# Altium PCB HiFive1.B01.PcbDoc (part 2 of 2)
Units mil, origin at the board's own origin, x right, y up, seen from the top; angles counter-clockwise.
Board outline 2700 x 2100 mil, 2 copper layers (Top Layer, Bottom Layer), stack 61 mil thick; 112 components, 78 nets, 451 pads, 247 vias.
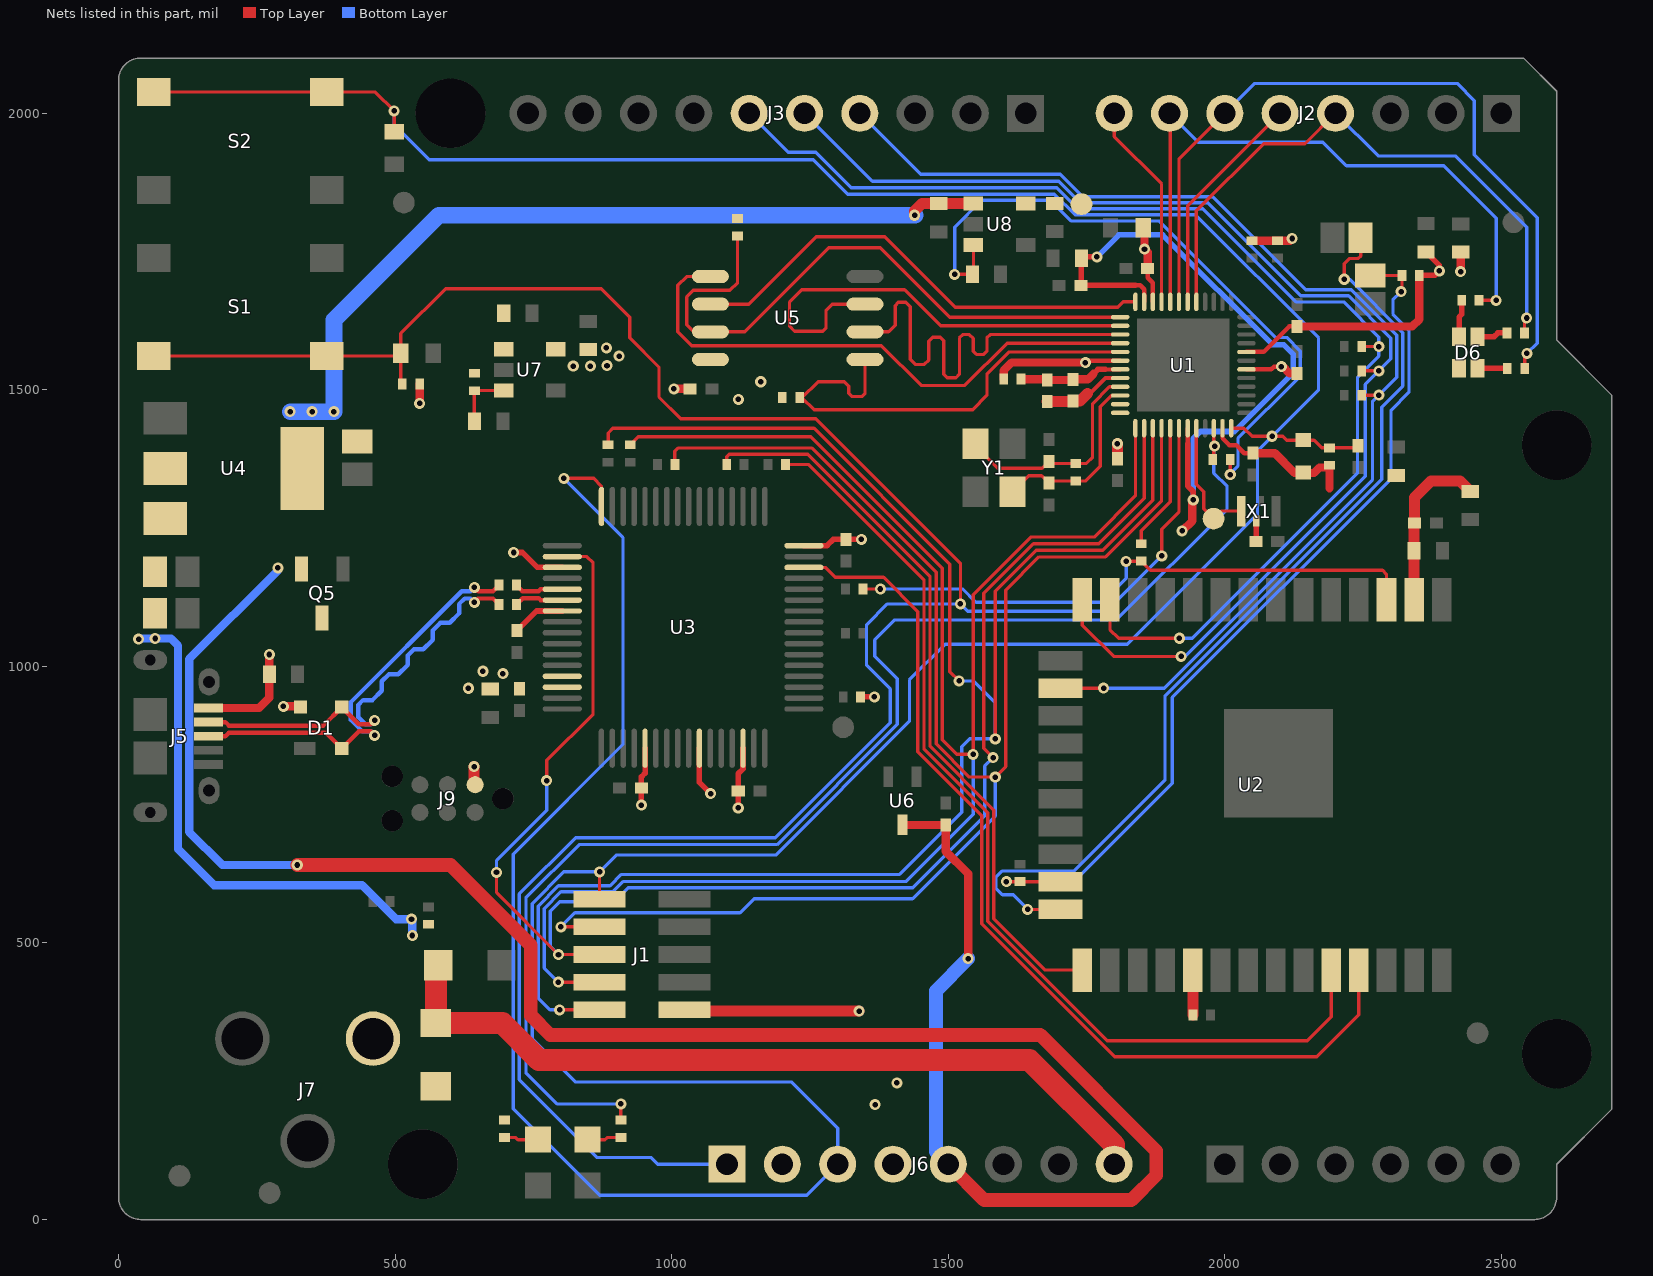
[diagram p2: the nets of this part, all layers, seen from the top]

## Via types
v1: diameter 20, hole 10, Top Layer to Bottom Layer, tented both sides, 229 vias
v2: diameter 20, hole 10.1, Top Layer to Bottom Layer, tented both sides, 18 vias

## Nets (pads, with @x,y where several pads share a name; then routed paths per layer and width w, separated by ;. In a path a pad name is that pad's centre, name@x,y a point inside that pad or via, vN(x,y) a via of type N, cw(c..) or ccw(c..) an arc to the next point about the centre after c; other vN are vias at no path point) (continued)
GPIO_19: J2.4 R18.2 U1.41 | length 1112.7
  Top Layer w6: U1.41@1948.62,1659.17 1948.62,1823.62 2070,1945 2145,1945 J2.4@2200,2000 ; R18.2@2541.75,1603 2541.75,1626.06 v1(2545.69,1630)
  Bottom Layer w6: J2.4@2200,2000 2277,1923 2417,1923 2545.69,1794.31 v1(2545.69,1630)
GPIO_20: J2.5 U1.42 | length 410.1
  Top Layer w6: U1.42@1932.87,1659.17 1932.87,1832.87 J2.5@2100,2000
GPIO_21: J2.6 R17.2 U1.43 | length 1401.7
  Top Layer w6: U1.43@1917.13,1659.17 1917.13,1917.13 J2.6@2000,2000 ; R17.2@2542.28,1539 2542.28,1562.06 v1(2546.22,1566)
  Bottom Layer w6: J2.6@2000,2000 2054,2054 2420,2054 2451,2023 2451,1925 2564.69,1811.31 2564.69,1584.46 v1(2546.22,1566)
GPIO_22: J2.7 R19.2 U1.44 | length 1186
  Top Layer w6: J2.7@1900,2000 1901.38,1998.62 U1.44@1901.38,1659.17 ; R19.2@2463.69,1662 v1(2490.69,1662)
  Bottom Layer w6: J2.7@1900,2000 1952,1948 2177,1948 2220,1905 2396,1905 2490.69,1810.31 v1(2490.69,1662)
GPIO_23: J2.8 U1.45 | length 376.3
  Top Layer w6: J2.8@1800,2000 1800,1958 1885.63,1872.37 U1.45@1885.63,1659.17
JTAG_TCK: J1.4 R25.2 U1.13 | length 2996.5
  Top Layer w6: v1(795.17,429.12) J1.4@869.57,429.12 ; R25.2@925,1400.75 939.27,1415.02 1251.73,1415.02 1489,1177.75 1489,867.2 1515.2,841 v1(1545,841) 1545,1130 1649,1234 1764,1234 1838.39,1308.39 U1.13@1838.39,1430.83
  Bottom Layer w6: v1(795.17,429.12) 769.61,454.68 769.61,562.21 799.8,592.4 893.11,592.4 911.81,611.1 1423.14,611.1 1545,732.96 v1(1545,841)
JTAG_TDI: J1.8 R24.2 U1.16 | length 2869.1
  Top Layer w6: v1(799.61,529.12) J1.8@869.57,529.12 ; R24.2@1005.75,1365 1005.75,1389.31 1011.28,1394.84 1253.8,1394.84 1478,1170.64 1478,859.92 1537.92,800 v1(1585,800) 1604,819 1604,1138.09 1663.91,1198 1784.46,1198 1885.63,1299.17 U1.16@1885.63,1430.83
  Bottom Layer w6: v1(799.61,529.12) 825.02,554.52 1123.48,554.52 1148.94,579.98 1435.5,579.98 1585,729.48 v1(1585,800)
JTAG_TDO: J1.6 U1.14 U3.2 | length 2806.2
  Top Layer w6: v1(683.22,627.52) 683.22,591.2 v1(795.3,479.12) J1.6@869.57,479.12 ; v1(773.81,793.39) 774.32,793.91 774.32,830.31 857.69,913.68 857.69,1187.4 846.42,1198.66 U3.2@802.13,1198.66 ; v1(1581,835) 1564,852 1564,1132.03 1653.97,1222 1772,1222 1854.13,1304.13 U1.14@1854.13,1430.83
  Bottom Layer w6: v1(683.22,627.52) 683.22,649.22 773.81,739.81 v1(773.81,793.39) ; v1(795.3,479.12) 780.61,493.81 780.61,557.65 797.71,574.75 895.63,574.75 920.98,600.1 1436.02,600.1 1566,730.08 1566,820 v1(1581,835)
JTAG_TMS: J1.2 R26.2 U1.15 | length 3162.7
  Top Layer w6: v1(797.34,379.12) J1.2@869.57,379.12 ; R26.2@885,1404.69 885,1422.05 893.4,1430.45 1257.32,1430.45 1502.87,1184.91 1502.87,990.46 v1(1519.53,973.81) ; v1(1585,869) 1585,1136.06 1658.94,1210 1779.49,1210 1869.88,1300.4 U1.15@1869.88,1430.83
  Bottom Layer w6: v1(797.34,379.12) 779.81,379.12 758.61,400.32 758.61,566.76 795.24,603.4 888.55,603.4 909.05,623.9 1411.9,623.9 1524.5,736.5 1524.5,854.5 1539,869 v1(1585,869) 1585,933.91 1545.11,973.81 v1(1519.53,973.81)
LF_CLK: TP5.1 U1.20 X1.3 | length 232.3
  Top Layer w6: U1.20@1948.62,1430.83 1948.62,1409 1948.38,1408.76 1948.38,1329.21 1962,1315.59 1962,1284.89 TP5.1@1979.74,1267.16 1993.57,1281 X1.3@2029.5,1281
NetC8_1: C8.1 C9.1 U1.8 | length 149.5
  Top Layer w7: 1752.08,1493.26 1756.43,1493.26 1784.55,1521.38 U1.8@1810.83,1521.38
  Top Layer w20: C8.1@1678.99,1478.69 1724.83,1478.69 C9.1@1725.83,1479.69 1738.51,1479.69 1752.08,1493.26
NetC12_1: C12.1 R4.1 U1.9 Y1.1 | length 402.2
  Top Layer w6: Y1.1@1549.54,1402.31 1549.54,1398.75 1589.7,1358.59 1669.57,1358.59 C12.1@1681.83,1370.84 1685.76,1366.91 R4.1@1730.45,1366.91 1749.33,1366.91 1760.83,1378.4 1760.83,1475.02 1791.43,1505.63 U1.9@1810.83,1505.63
NetC13_1: C13.1 R4.2 U1.10 Y1.3 | length 338
  Top Layer w6: Y1.3@1616.46,1315.69 1645.36,1344.59 1668.71,1344.59 1678.94,1334.36 1679.99,1335.41 R4.2@1730.45,1335.41 1748.67,1335.41 1775,1361.74 1775,1469.4 1795.48,1489.88 U1.10@1810.83,1489.88
NetC21_1: C21.1 R31.1 U7.3 | length 108.7
  Top Layer w6: C21.1@643.41,1443 643.18,1443.22 R31.1@643.18,1498.66 643.29,1498.77 U7.3@696.11,1498.77
NetC22_1: C22.1 R32.2 U8.3 | length 1232.6
  Top Layer w6: v1(1511.46,1708.88) C22.1@1543.58,1708.88 1545.48,1710.78 U8.3@1545.48,1761.99 ; R32.2@2009.75,1374 2009.85,1373.9 v1(2009.85,1346.79)
  Bottom Layer w6: v1(1511.46,1708.88) 1511.46,1794.35 1560.11,1843 1684.17,1843 1721.79,1805.38 1880.73,1805.38 2091.36,1594.75 2111.79,1594.75 2136.47,1570.07 2136.47,1525.38 2129.77,1518.68 ; v1(2009.85,1346.79) 2009.85,1348.35 2023.75,1362.25 2023.75,1412.18 2130.01,1518.44
NetD6_1: D6.1 R19.1 | length 67.9
  Top Layer w10: D6.1@2423.54,1596.09 2423.54,1631.68 2428.25,1636.39 R19.1@2428.25,1662
NetD6_2: D6.2 R18.1 | length 56.1
  Top Layer w10: D6.2@2457,1596.09 2486.84,1596.09 2493.75,1603 R18.1@2510.25,1603
NetD6_3: D6.3 R17.1 | length 49.9
  Top Layer w10: D6.3@2457,1539 R17.1@2506.85,1539
NetD9_2: D9.2 R27.2 | length 61.6
  Top Layer w6: R27.2@698,148.28 718.03,148.28 721.97,144.34 D9.2@758,144.34
NetD10_2: D10.2 R28.2 | length 61.6
  Top Layer w6: D10.2@848,144.34 879.22,144.34 883.16,148.28 R28.2@908,148.28
NetD13_2: D13.2 J7.1
NetR12_2: R12.2 U2.29 | length 81
  Top Layer w20: R12.2@1942.28,370 U2.29@1942.28,450.98
PLL_AVDD: C8.2 C9.2 R1.2 U1.7 | length 183.8
  Top Layer w7: 1784.13,1537.13 U1.7@1810.83,1537.13
  Top Layer w10: 1762.44,1529.11 1770.45,1537.13 1784.13,1537.13
  Top Layer w15: R1.2@1635.51,1519.37 1677.67,1519.37 C8.2@1678.99,1518.06 1724.83,1518.06 C9.2@1725.83,1519.06 1752.38,1519.06 1762.44,1529.11
QSPI_CS0: R13.1 U1.5 U5.1 | length 858.8
  Top Layer w6: U5.1@1349.53,1555 1349.53,1493.53 1344,1488 1326,1488 1320,1494 1320,1507 1312,1515 1264.51,1515 1235.45,1485.93 1257.35,1464.03 1544.03,1464.03 1570,1490 1570,1528.2 1610.42,1568.62 U1.5@1810.83,1568.62
QSPI_DQ0: U1.4 U5.5 | length 1021.3
  Top Layer w6: U5.5@1070,1705 1027,1705 1011,1689 1011,1605 1036,1580 1379,1580 1451,1508 1530,1508 1606.37,1584.37 U1.4@1810.83,1584.37
QSPI_DQ1: U1.3 U5.2 | length 841.2
  Top Layer w6: U5.2@1349.53,1605 1392,1605 1404,1617 1404,1652.48 1409.72,1658.19 1423.41,1658.19 1431,1650.61 1431,1555 1440,1546 1457,1546 1465,1554 1465,1588.12 1472,1595.12 1485.88,1595.12 1492,1589 1492,1528 1498,1522 1514,1522 1520.26,1528.26 1520.26,1593.9 1526.48,1600.12 1537.88,1600.12 1545,1593 1545,1570 1551,1564 1564,1564 1570,1570 1570,1594 1576.12,1600.12 U1.3@1810.83,1600.12
QSPI_DQ2: U1.2 U5.3 | length 857.2
  Top Layer w6: U5.3@1349.53,1655 1290,1655 1279,1644 1279,1612 1273,1606 1222,1606 1213,1615 1213,1659 1235,1681 1421,1681 1486.13,1615.87 U1.2@1810.83,1615.87
QSPI_DQ3: R29.2 U1.1 U5.7 | length 1141.1
  Top Layer w6: R29.2@1119,1778.25 1119,1694 1105,1680 1039,1680 1027,1668 1027,1618 1040,1605 U5.7@1070,1605 1132,1605 1284,1757 1377,1757 1502.39,1631.61 U1.1@1810.83,1631.61
QSPI_SCK: U1.48 U5.6 | length 876
  Top Layer w6: U5.6@1070,1655 1139,1655 1261,1777 1385,1777 1512.76,1649.24 1806.24,1649.24 1816.17,1659.17 U1.48@1838.39,1659.17
RESET: C16.1 D3.2 D5.1 J1.10 J6.3 R5.1 S2.3 S2.4 U1.24 U3.64 | length 7629.2
  Top Layer w6: S2.4@63.5,2038.58 S2.3@376.5,2038.58 464.05,2038.58 v1(498.06,2004.57) D5.1@498.06,1966.92 ; v1(805,1340) 859,1340 872.99,1326.01 U3.64@872.99,1289.21 ; J1.10@869.57,579.12 v1(869.57,628.57) ; U1.24@2011.61,1430.83 2034.54,1430.83 2049.21,1416.16 v1(2085.71,1416.16) 2104.86,1416.16 2112.12,1408.9 2161.3,1408.9 2175.08,1395.12 R5.1@2189.32,1395.12 2236.89,1395.12 C16.1@2240.83,1399.06
  Bottom Layer w6: v1(498.06,2004.57) 498.06,1979.43 561.31,1916.18 1255.82,1916.18 1318,1854 1691.85,1854 1729.47,1816.38 1946.94,1816.38 2169.47,1593.85 2169.47,1499.92 v1(2085.71,1416.16) 2059,1389.45 2059,1275 1824,1040 1494.29,1040 1429.91,975.62 1429.91,900.78 1188.13,659 900,659 v1(869.57,628.57) 804.86,628.57 747.61,571.32 747.61,326.76 825.61,248.76 1216.05,248.76 1300,164.82 J6.3@1300,100 1244,44 869.48,44 713.4,200.08 713.4,660.4 911.85,858.85 911.85,1233.15 v1(805,1340)
SPI_CS2: R10.1 R21.2 SJ1.2 U2.23 | length 1639.3
  Top Layer w6: v1(1605,611) 1605.37,610.63 U2.23@1702.91,610.63 ; SJ1.2@2262.83,1706.96 R10.1@2316.32,1706.96 ; v1(2318.61,1677.5) 2320.25,1679.14 R10.1@2320.25,1706.96
  Bottom Layer w6: v1(1605,611) 1727,611 1905,789 1905,943.88 2300.51,1339.39 2300.51,1463.51 2333,1496 2333,1608.13 2304,1637.13 2304,1662.89 v1(2318.61,1677.5)
SPI_MISO: J3.5 R15.1 U2.14 | length 2240
  Top Layer w6: U2.14@1742.28,1120.28 1742.28,1074.72 1799,1018 v1(1921,1018) ; R15.1@2251.51,1534.37 v1(2278.51,1534.37)
  Bottom Layer w6: J3.5@1240,2000 1362.96,1877.04 1699.92,1877.04 1738.59,1838.38 1969.06,1838.38 2137.44,1670 2223.77,1670 2300,1593.77 2300,1555.86 v1(2278.51,1534.37) 2254,1509.86 2254,1343.79 1928.21,1018 v1(1921,1018)
SPI_MOSI: J3.4 R9.1 U2.16 | length 2164.3
  Top Layer w6: U2.16@1702.91,960.63 v1(1781,960.63) ; R9.1@2251.51,1490.37 v1(2278.51,1490.37)
  Bottom Layer w6: J3.4@1340,2000 1450.02,1889.98 1702.55,1889.98 1743.14,1849.38 1977.86,1849.38 2146.24,1681 2229.02,1681 2311,1599.02 2311,1522.86 v1(2278.51,1490.37) 2267,1478.86 2267,1336.99 1890.64,960.63 v1(1781,960.63)
SPI_SCK: J3.6 R16.1 U2.13 | length 2226.1
  Top Layer w6: U2.13@1792.28,1120.28 1792.28,1066.72 1808,1051 v1(1918,1051) ; R16.1@2251.51,1578.37 v1(2278.51,1578.37)
  Bottom Layer w6: J3.6@1140,2000 1210.5,1929.5 1260.5,1929.5 1324.6,1865.4 1696.01,1865.4 1734.03,1827.38 1960.26,1827.38 2100.41,1687.23 2128.64,1659 2214.97,1659 2278.51,1595.46 v1(2278.51,1578.37) 2278.51,1561.24 2240,1522.73 2240,1350 1941,1051 v1(1918,1051)
USB_D_N: D1.3 J5.2 R2.1 | length 777.6
  Top Layer w8: J5.2@162.5,899.41 193.07,899.41 199.37,893.11 370.24,893.11 D1.3@403.46,926.33 434.36,895.43 455.96,895.43 v1(462.96,902.43) ; v1(643.21,1115.89) 643.21,1116.39 649.71,1122.89 676.88,1122.89 R2.1@687.88,1111.89
  Bottom Layer w8: v1(462.96,902.43) 455.96,895.43 446.1,895.43 433.05,908.48 433.05,930.25 442,939.2 458.99,939.2 475.76,955.97 475.76,972.96 488.8,986 505.79,986 522.56,1002.77 522.56,1019.76 534,1031.2 550.99,1031.2 567.76,1047.97 567.76,1064.96 581.8,1079 598.79,1079 615.56,1095.77 615.56,1112.76 625.69,1122.89 636.21,1122.89 v1(643.21,1115.89)
USB_D_P: D1.2 J5.3 R6.1 | length 778.6
  Top Layer w8: J5.3@162.5,873.82 193.07,873.82 199.37,880.11 374.87,880.11 D1.2@403.46,851.53 434.36,882.43 455.96,882.43 v1(462.96,875.43) ; v1(643.21,1142.89) 650.21,1135.89 676.88,1135.89 R6.1@687.88,1146.89
  Bottom Layer w8: v1(462.96,875.43) 455.96,882.43 440.72,882.43 420.05,903.1 420.05,935.64 620.3,1135.89 636.21,1135.89 v1(643.21,1142.89)
USB_D_R_N: R2.2 U3.6 | length 88.8
  Top Layer w8: R2.2@719.38,1111.89 730.75,1123.26 759.35,1123.26 762.69,1119.92 U3.6@802.13,1119.92
USB_D_R_P: R6.2 U3.5 | length 88.5
  Top Layer w8: R6.2@719.38,1146.89 730,1136.26 759.35,1136.26 762.69,1139.61 U3.5@802.13,1139.61
VBUS: C29.2 D1.4 J5.1 Q5.3 | length 227.2
  Top Layer w15: J5.1@162.5,925 254,925 272.41,943.41 C29.2@272.41,986 v1(272.41,1021.59) ; v1(297.83,927.83) 327.15,927.83 D1.4@328.65,926.33
VDD_1V8: C1.1 C2.2 C3.2 C50.1 R1.1 TP1.1 U1.6 U1.30 U1.46 U8.5 | length 473.4
  Top Layer w8: v1(1747.83,1549.37) 1751.33,1552.87 U1.6@1810.83,1552.87 ; C2.2@1860.51,1719.37 1860.51,1702.87 1869.88,1693.5 U1.46@1869.88,1659.17 ; U1.30@2039.17,1537.13 2084.13,1537.13 2089,1542 v1(2102.47,1542)
  Top Layer w15: R1.1@1600.08,1519.37 1600.08,1534.73 1614.72,1549.37 v1(1747.83,1549.37) ; C1.1@1852.53,1793 1854.83,1790.7 v1(1854.83,1754.37) 1860.51,1748.69 C2.2@1860.51,1719.37 ; v1(2102.47,1542) 2105,1542 2117.32,1529.68 C3.2@2130.83,1529.68
VDD_3V3: C4.2 C5.2 C6.1 C7.1 C10.1 C11.1 C14.1 C15.1 C17.2 C18.2 C19.2 C20.2 C23.2 C24.1 C25.1 C26.1 C27.1 C28.2 C30.1 C47.1 D3.1 D6.4 J1.1 J6.2 J6.4 J9.1 R3.1 R5.2 R7.2 R8.2 R10.2 R13.2 R27.1 R29.1 R33.1 U1.11 U1.12 U1.19 U1.23 U1.32 U1.47 U2.2 U3.3 U3.7 U3.13 U3.14 U3.21 U3.26 U3.30 U3.48 U5.8 U7.5 X1.4 | length 3563.5
  Top Layer w8: 1838,1689 1846.91,1689 1854.13,1681.78 U1.47@1854.13,1659.17 ; 1932.87,1402.62 U1.19@1932.87,1430.83 ; U1.23@1995.87,1430.83 1995.87,1412.71 2008.29,1400.29 2020.71,1400.29 2035.32,1385.68 C5.2@2051,1385.69 ; U1.32@2039.17,1568.62 2070.59,1568.62 2116.66,1614.69 C18.2@2130.83,1614.68
  Top Layer w10: v1(714,1206) 730,1206 757.02,1178.98 U3.3@802.13,1178.98 ; C30.1@720,1064.68 755.55,1100.24 U3.7@802.13,1100.24 ; v1(945,749.22) C27.1@945,780 945,800.22 951.73,806.95 U3.21@951.73,852.2 ; U3.26@1050.16,852.2 1050.16,790.3 v1(1070.24,770.22) ; v1(1120.32,744.08) C26.1@1120.32,775 1120.32,806.08 1128.9,814.66 U3.30@1128.9,852.2 ; U3.48@1239.13,1218.35 1280.73,1218.35 1292.07,1229.68 C24.1@1315,1229.68 v1(1342.95,1229.68) ; R33.1@1341.5,945 v1(1366.31,945) ; v1@1769.22,1740.55 v1(1768.81,1740.55) 1743.14,1740.55 C10.1@1740.59,1738 1740.59,1689.91 C20.2@1739.69,1689 1838,1689 ; 1932.87,1402.62 1932.87,1326.33 1943,1316.2 v1(1943,1301) ; C17.2@2056.31,1226 2057.06,1226.75 X1.4@2057.06,1263.28 ; R10.2@2355.69,1706.96 2379.96,1706.96 v1(2388,1715) 2388,1725.2 C14.1@2363.8,1749.41
  Top Layer w15: v1(544.28,1475.72) R3.1@544.28,1511 ; v1(1003.76,1501.75) 1003.95,1501.93 C23.2@1033.08,1501.93 ; v1(1923,1245) 1941.31,1263.31 1941.31,1299.31 v1(1943,1301) ; R8.2@2049.01,1769.8 R7.2@2095.51,1769.8 2117.8,1769.8 v1(2121.74,1773.74) ; C5.2@2051,1385.69 2090.32,1385.68 2126.16,1349.84 D3.1@2138.56,1349.84 ; C18.2@2130.83,1614.68 2338.78,1614.69 2351.75,1627.65 R10.2@2351.75,1706.96 ; D3.1@2140.83,1347.58 D3.1@2138.56,1349.84 ; 2189.32,1322 2189.32,1359.68 2171.14,1359.68 2161.3,1349.84 D3.1@2138.56,1349.84 ; v1(2426.52,1713.87) C15.1@2426.52,1749.07
  Top Layer w20: v1(642.78,818.89) 642.78,787.99 J9.1@644.65,786.11 ; J1.1@1023.11,379.12 1025.4,376.83 v1(1338.74,376.83) ; C19.2@1805.83,1375.54 v1(1805.83,1402.62) ; U2.2@2342.28,1120.28 C6.1@2342.28,1209.1 2342.28,1258.2 C4.2@2343.18,1259.1 2343.18,1305.18 2373,1335 2425.59,1335 C7.1@2444,1316.59
  Bottom Layer w10: v1(1768.81,1740.55) 1808.47,1780.22 1887.51,1780.22 2085.97,1581.75 2106.4,1581.75 2123.47,1564.69 2123.47,1530.77 2017.48,1424.78 1956.08,1424.78 1943,1411.7 v1(1943,1301)
  other v1: 1367.8,207.86 1407.01,247.17 632.29,960.59 694.87,987.17 658.54,991.27 1120.69,1482.91 1160.97,1514.77 822,1543 853,1543 883,1544 905,1561 882,1576
VDD_5V0: C31.1 C42.1 C45.1 C48.1 J6.5 Q5.2 R31.2 U4.2 U4.4 U6.3 U7.1 U8.1 | length 5306.9
  Top Layer w15: U6.3@1417.21,714.02 1417.81,713.41 C31.1@1495.46,713.41 1495.46,665.75 1535.97,625.23 v1(1535.97,471.74)
  Top Layer w20: v1(1439.3,1815.71) 1439.3,1823.58 1452.44,1836.72 C48.1@1482.63,1836.72 1482.71,1836.8 U8.1@1545.48,1836.8
  Top Layer w25: v1(323,641) 600,641 745.27,495.73 745.27,368.66 780.31,333.61 1666.39,333.61 1876,124 1876,80 1831,35 1565,35 J6.5@1500,100
  Bottom Layer w15: v1(288,1178) 288,1173.5 127.5,1013 127.5,701 187.5,641 v1(323,641)
  Bottom Layer w25: J6.5@1500,100 1477.61,122.39 1477.61,413.38 v1(1535.97,471.74)
  Bottom Layer w30: v1(310,1460.64) v1(349.66,1460.64) v1(389.32,1460.64) 389.32,1626.32 579,1816 v1@1440,1816
VDD_CORE_EN: R28.1 R32.1 U1.22 | length 2420.8
  Top Layer w6: R28.1@908,183.71 v1(908,209) ; R32.1@1980,1378.75 1980,1398.88 1980.12,1399 U1.22@1980.12,1430.83
  Bottom Layer w6: v1(908,209) 792.48,209 736.53,264.95 736.53,582.07 832.45,678 1190.43,678 1407.65,895.22 1407.65,978.07 1367.22,1018.49 1367.22,1047.85 1403.37,1084 1803.5,1084 2004,1284.5 2004,1325.77 1980.12,1349.65 1980.12,1399 1980.62,1398.5 v1(1981.5,1398.5) 1981.5,1398.81 v1@1981.69,1399
VDD_DCIN: C43.1 C44.1 D12.1 D13.1 J6.8 R30.2 U4.3 | length 2414.1
  Top Layer w20: D12.1@575.23,459.37 D12.1@580,464.14
  Top Layer w40: D12.1@575.23,459.37 573.58,457.72 D13.1@573.58,355.19 693.52,355.19 760.15,288.56 1646.44,288.56 1800,135 J6.8@1800,100
  Bottom Layer w15: v1(36,1049.5) 37,1050.5 v1(66,1050.5) 94.5,1050.5 107.5,1037.5 107.5,669.5 172.5,604.5 440,604.5 501.5,543 v1(529.5,543) 531,541.5 v1(531,513.5)
WAKE: D2.1 J6.1 R3.2 S1.1 S1.2 U1.18 | length 4547
  Top Layer w6: S1.2@63.5,1561.42 S1.1@376.5,1561.42 505.42,1561.42 D2.1@510,1566 ; R3.2@508.84,1511 510,1512.16 D2.1@510,1566 ; J6.1@1085.32,114.69 J6.1@1100,100 ; v1(1522,1113) 1522,1186.41 1260.41,1448 1016,1448 977,1487 977,1541 924,1594 924,1631.58 872.56,1683.02 591.02,1683.02 510,1602 D2.1@510,1566 ; v1(1886,1200) 1886,1248 1917.13,1279.13 U1.18@1917.13,1430.83
  Bottom Layer w6: J6.1@1100,100 975,100 963.03,111.97 865.55,111.97 724.4,253.12 724.4,588.61 826.22,690.43 1187.3,690.43 1395.07,898.2 1395.07,959.27 1352.28,1002.05 1352.28,1075.28 1390,1113 v1(1522,1113) 1535,1100 1786,1100 v1(1886,1200)
WF_BOOT_STRAP: R23.2 U2.25 | length 1340.6
  Top Layer w6: R23.2@1099.25,1365 1099.25,1379.44 1103.66,1383.84 1245.74,1383.84 1467,1162.58 1467,855.36 1582.48,739.88 1582.48,543.63 1675.13,450.98 U2.25@1742.28,450.98
WF_INT: SJ2.2 U2.24 | length 1760.8
  Top Layer w6: v1(1643.63,560.63) U2.24@1702.91,560.63 ; v1(2216,1700) 2216,1728 2225.61,1737.61 2241.16,1737.61 2245.59,1742.05 SJ2.2@2245.59,1775
  Bottom Layer w6: v1(1643.63,560.63) 1617.26,587 1598,587 1586,599 1586,618.87 1597.13,630 1727.26,630 1891.75,794.49 1891.75,946.18 2284,1338.44 2284,1468.99 2322,1506.99 2322,1603.57 2225.57,1700 v1(2216,1700)
WF_RESET: R20.2 U1.17 | length 226.5
  Top Layer w6: R20.2@1849,1226 1849,1245.16 1901.38,1297.54 U1.17@1901.38,1430.83
WF_RESET_R: R14.2 R20.1 U2.3 | length 1060
  Top Layer w6: R14.2@1345.75,1140 v1(1377.19,1140) ; v1(1821.74,1190.02) 1845.61,1190.02 R20.1@1847.03,1188.6 ; R20.1@1849,1190.57 1865.57,1174 2285.28,1174 2292.28,1167.01 U2.3@2292.28,1120.28
  Bottom Layer w6: v1(1377.19,1140) 1526,1140 1550,1116 1778,1116 1821.74,1159.74 v1(1821.74,1190.02)
WF_UART_RX: R22.2 U2.34 | length 1815.2
  Top Layer w6: R22.2@1205.75,1365 1248.14,1365 1456,1157.14 1456,850.8 1571.48,735.33 1571.48,539.08 1787.56,323 2149,323 2192.28,366.28 U2.34@2192.28,450.98
WF_UART_TX: U2.35 U3.46 | length 1745.1
  Top Layer w6: U3.46@1239.13,1178.98 1277.32,1178.98 1295.3,1161 1383.06,1161 1445,1099.06 1445,845.84 1560.48,730.36 1560.48,534.52 1801,294 2166,294 2242.28,370.28 U2.35@2242.28,450.98
pads on no net: Designator31.1 Designator32.1 Designator33.1 J3.8 J4.1 J5.4 J5.SH4 J5.SH5 J9.SH1 J9.SH2 J9.SH3 U1. U2. U2.4 U2.5 U2.6 U2.7 U2.8 U2.9 U2.10 U2.11 U2.12 U2.17 U2.18 U2.19 U2.20 U2.21 U2.22 U2.26 U2.27 U2.28 U2.30 U2.31 U2.32 U2.33 U2.36 U2.37 U3.1 U3.8 U3.9 U3.10 U3.11 U3.12 U3.17 U3.18 U3.19 U3.20 U3.23 U3.27 U3.28 U3.29 U3.32 U3.33 U3.35 U3.36 U3.37 U3.38 U3.41 U3.42 U3.43 U3.45 U3.51 U3.52 U3.53 U3.54 U3.55 U3.56 U3.57 U3.58 U3.60 U3.61 U7.4 U8.4 X1.1

## Polygon pours and split planes (outlines as drawn)
VDD_3V3 on Top Layer "Bottom Layer-No Net" (solid, remove dead copper, pour order 63): 1181.63,526.4 1181.63,403.12 1225.61,359.15 1278.27,359.61 1378.61,359.61 1396.74,377.74 1396.74,495.7 1139.46,752.97 1135.19,757.24 1135.19,790.36 1129.33,796.23 1045.95,796.23 1042.93,794.93 1040.78,792.78 1040.78,710.88 1041.09,665.43
NetD13_2 on Top Layer "NETD13_2_L01_P048" (solid, remove dead copper, pour order 48): 514.92,300 546.42,268.49 622.98,268.49 635,256.47 635,170 410,170 410,380 514.92,380
VDD_3V3 on Top Layer "Bottom Layer-No Net" (solid, remove dead copper, pour order 50): 700.33,1001.46 695.68,1006.1 695.68,1044.85 702.09,1051.25 730.13,1051.25 732.4,1053.52 732.4,1075.17 725.81,1081.77 670.55,1081.77 619.73,1030.95 619.73,953.58 626.81,946.49 737.97,946.49 748.32,956.84 836.31,956.84 838.75,959.28 838.48,985.68 834.67,989.49 712.46,989.49
VDD_3V3 on Top Layer "Bottom Layer-No Net" (solid, remove dead copper, pour order 55): 770,1591 906,1591 918,1579 918,1535 909,1526 780,1526 768,1538 768,1589
GND on Top Layer "Bottom Layer-No Net" (solid, remove dead copper, pour order 57): 888.81,1611.48 894.86,1617.53 894.86,1650.55 873.2,1672.2 817.38,1672.2 804.12,1658.94 804.12,1620.55 813.19,1611.48
VDD_1V8 on Top Layer "Bottom Layer-No Net" (solid, remove dead copper, pour order 59): 1621.05,1822.65 1709.7,1822.65 1719.06,1813.28 1761.27,1813.28 1770.64,1822.65 1817.36,1822.65 1833.89,1806.11 1833.89,1774.6 1840.44,1768.04 1840.44,1714.05 1847.92,1706.57 1872.28,1706.57 1876.33,1710.62 1876.33,1852.92 1865.41,1863.84 1627.92,1863.84 1619.5,1855.42 1619.5,1824.51 1620.74,1823.27
VDD_3V3 on Top Layer "VDD_3V3_L01_P047" (solid, remove dead copper, pour order 47): 1790.83,1479.37 1830.83,1479.37 1830.83,1394.37 1830.83,1354.37 1790.83,1354.37 1790.83,1389.37
GND on Top Layer "Bottom Layer-No Net" (solid, remove dead copper, pour order 53): 835.2,947.92 837.81,945.31 837.81,888.81 819.24,870.23 658.12,870.23 652.66,875.69 652.66,920.28 654.79,922.41 698.39,922.41 710.55,934.58 747.74,934.58 761.09,947.92
VDD_3V3 on Top Layer "VDD_3V3_L01_P040" (solid, remove dead copper, pour order 40): 1435,247.92 1423.4,259.52 672.61,259.52 658,245.17 658,180 668,170 709,170 709,171 760.98,222.98 944.56,222.98 977,190.54 977,108 1042,43 1151,43 1406,43 1435,72
VDD_5V0 on Top Layer "VDD_5V0_L01_P036" (solid, remove dead copper, pour order 36): 624.1,1515.57 630.56,1522.03 652.04,1522.03 654.36,1524.35 654.36,1554.24 660.45,1560.34 711.24,1560.34 717,1565.99 717,1652 705,1664 623.18,1664 611.34,1652.16 611.34,1557.69 572.28,1517.25 572.28,1499.34 560.93,1488 270,1488 174,1392 44,1392 41,1389 41,1319 45,1315 136,1315 141,1310 141,1292 281,1152 355,1152 377,1174 377,1301 377,1364 398,1385 546,1385 623.26,1462.26 624.1,1461.95
VDD_3V3 on Top Layer "VDD_3V3_L01_P046" (solid, remove dead copper, pour order 46): 1101.76,1801 1089.07,1788.31 1089.07,1742.3 1075.32,1728.55 1029.83,1728.55 994,1692.59 994,1601 1028,1567 1105,1567 1137,1535 1188,1535 1211,1512 1211,1464 1206,1459 1070,1459 1056,1473 1056,1521.93 1048.93,1529 1011,1529 941,1599 941,1827 1018,1904 1139.12,1904 1146.87,1896.54 1146.87,1816.7 1131.17,1801
VDD_3V3 on Top Layer "VDD_3V3_L01_P044" (solid, remove dead copper, pour order 44): 1912,1201 1912,1260 1928,1276 1981,1276 1997,1260 1997,1252 2008,1241 2009,1240 2029,1240 2039,1240 2045,1246 2047,1248 2047,1259 2047,1273 2050,1276 2052,1278 2061,1278 2063,1278 2067,1274 2070,1271 2070,1223 2070,1213 2075,1208 2076,1207 2106,1207 2126,1207 2144,1225 2144,1260 2144,1320 2092,1372 2026,1372 2019,1372 2015,1376 2015,1399 2018,1402 2081,1402 2091,1392 2108,1375 2179,1375 2197,1375 2197,1320 2206,1311 2242,1311 2294,1363 2329,1363 2438,1363 2457,1382 2457,1473 2446,1484 2441,1489 2367,1489 2342,1514 2339,1517 2339,1640 2339,1754 2348,1763 2350,1765 2379,1765 2393,1765 2404,1754 2404,1677 2404,1566 2408,1562 2410,1560 2425,1560 2429,1560 2434,1555 2433,1554 2433,1530 2433,1517 2437,1513 2481,1513 2486,1513 2499,1500 2499,1347 2463,1311 2382,1311 2358,1287 2358,1236 2358,1177.59 2293.95,1179.05 2286,1187 2210,1187 2199,1187 1926,1187
VBUS on Top Layer "VBUS_L01_P039" (solid, remove dead copper, pour order 39): 259.96,918 269.97,907.98 335.27,907.98 340.49,913.21 340.49,941.03 331.47,950.06 300.79,950.06 290.04,960.67 289.07,1007.87 299.2,1018 359,1018 383,1042 383,1108 378,1113 293.49,1113 253.46,1072.97 253.46,949.69 241.44,937.66 184.56,937.66 179.7,932.8 179.7,919.37 181.7,918
VDD_DCIN on Top Layer "a" (solid, remove dead copper, pour order 67): 612.5,530 600.5,542 549.5,542 535.5,556 515,556 505,546 505,365.5 544,326.5 602,326.5 612.5,337
VDD_DCIN on Top Layer "a" (solid, pour order 69): 45,1302.5 127.5,1302.5 136,1294 136,1239 120,1223 104.5,1223 93,1211.5 93,1050.86 78.22,1036.08 33.92,1036.08 21,1049 21,1290.5 32,1301.5 45,1301.5
GND on Top Layer "GND_L01_P071" (solid, remove dead copper, pour order 71): 2525,2080 30,2080 20,2070 10,2060 10,2040 10,35 35,10 100,10 2550,10 2575,35 2585,45 2585,85 2585,110 2605,130 2690,215 2690,390 2690,1480 2605,1565 2590,1580 2590,1790 2590,2015 2525,2080
VDD_3V3 on Bottom Layer "VDD_3V3_L02_P043" (solid, remove dead copper, pour order 43): 2397.64,1825 2440.08,1782.57 2440.08,1708.2 2433.42,1701.55 2381.08,1701.55 2377.31,1706 2377,1706 2328,1755 2319,1764 2161,1764 2152,1755 2116,1755 2106,1765 2106,1795 2136,1825
VDD_3V3 on Bottom Layer "Bottom Layer-No Net" (solid, remove dead copper, pour order 65): 1421.76,405.81 1453.08,374.49 1453.08,79.18 1453.88,77.3 1453.88,62.48 1437.74,46.34 1370.59,46.34 1346.19,70.74 1346.19,136.26 1213.32,269.13 1073.68,269.13 1054.44,288.38 1054.44,388.26 1070.01,403.83 1118.57,403.83
VDD_3V3 on Bottom Layer "VDD_3V3_L02_P045" (solid, remove dead copper, pour order 45): 670.04,932.31 648.9,911.17 648.9,861.05 665.4,844.56 665.4,813.25 647.52,795.37 611.89,795.37 583.21,824.05 583.21,946.36 620.07,986.51 639.6,1006.04 758.04,1006.04 790.06,1038.06 790.06,1164.94 762.48,1192.52 554.48,1192.52 532,1215 532,1509 555,1532 680.47,1532 738.47,1590 1101,1590 1135.46,1555.54 1267,1424 1342.74,1424 1774,1424 1884,1424 1956,1352 1956,1258 1929,1231 1907,1231 1785,1353 1458.41,1353 1369.14,1263.73 1369.14,1172.77 1341.2,1144.82 1341.2,994.99 1378.46,957.72 1378.46,890.97 1349.73,862.24 1301.6,862.24 1283.75,844.39 1283.75,795.49 1158.78,670.51 963.94,670.51 927.45,706.99 927.45,759 935.22,766.78 1030.7,766.78 1275.45,1011.52 1275.45,1261.63 1173,1353 1138,1388 1097.02,1428.98 1096.89,1430.81 1096.89,1483.88 1082.79,1497.99 1060.19,1497.99 1044.41,1482.21 1043.79,1482.21 723.21,1482.21 610,1369 610,1273.77 625.77,1258 802,1258 870.06,1189.94 871.3,1150.02 872,1149.3 872,1068.61 871.53,985.04 818.8,932.31
VDD_1V8 on Bottom Layer "VDD_1V8_L02_P049" (solid, remove dead copper, pour order 49): 1836,1735 1836,1768.33 1850.48,1782.82 1850.48,1784 1887,1784 1904,1767 1904.2,1767 2114.37,1556.82 2117.11,1556.82 2117.11,1521.95 2029.93,1434.77 1741.72,1434.77 1713.76,1462.74 1713.76,1475.6 1713.76,1534.76 1739,1560 1771.61,1560 1780.29,1551.32 1780.29,1505.89 1816.09,1470.1 1983.57,1470.1 1984.48,1469.19 1998.5,1483.21 1998.5,1611.82 1961.31,1649 1935,1649 1921,1650
GND on Bottom Layer "GND_L02_P073" (solid, remove dead copper, pour order 73): 2525,2080 30,2080 20,2070 10,2060 10,2040 10,35 35,10 100,10 2550,10 2575,35 2585,45 2585,85 2585,110 2605,130 2690,215 2690,390 2690,1480 2605,1565 2590,1580 2590,1790 2590,2015 2525,2080

## Keep-outs
Top Layer:
  circle w1: c2457,337 r39.37
  circle w1: c110,79 r39.2
  circle w1: c515.62,1838.64 r39.37
Keep-Out Layer:
  lines w1: 10,40 ccw(c40,40) 40,10 2560,10 ccw(c2560,40) 2590,40 2590,100 2690,200 2690,1490 2590,1590 2590,2040 2540,2090 40,2090 ccw(c40,2060) 10,2060 10,40

## Other copper
Top Layer:
  pour cut-out: 1838.39,1632.17 2011.61,1632.17 2011.61,1457.83 2007.15,1453.37 1838.83,1453.37 1838.83,1631.73
  text "'.Layer_Name'" at 919.03,-400.6 h60
Bottom Layer:
  region net VDD_5V0: 405,1490 305,1490 295,1480 295,1445 310,1430 390,1430 410,1450 410,1485
  text "'.Layer_Name'" at 919.03,-400.6 h60
Multi-Layer:
  pour cut-out: 2409.99,1171 2409.99,404 2690,404 2690,1171

## Silkscreen, mask and mechanical layers (free items; w line width, h text height)
Top Overlay:
  circle w15: c437.91,1830.39 r6
  circle w15: c433.94,1540.11 r6
  text "RESET" at 461.01,1858.06 h60 r90
  text "1.8V" at 1776,1830 h40
  text "GND" at 2501,1750 h40
  text "WAKE" at 460.36,1569.82 h60 r90
  text "WAKE" at 1135.11,168.12 h80 r90
  text "GND" at 309.98,31.79 h40
  text "'.Layer_Name'" at 919.03,-400.6 h60
Bottom Overlay:
  pour cut-out: 1800.04,1966.89 cw(c1800.04,2000.35) 1766.58,2000.35 cw(c1800.04,2000.35) 1800.04,2033.82 cw(c1800.04,2000.35) 1833.51,2000.35 cw(c1800.04,2000.35)
  text "'.Layer_Name'" at 919.03,-400.6 h60
Top Paste:
  text "'.Layer_Name'" at 919.03,-400.6 h60
Bottom Paste:
  text "'.Layer_Name'" at 919.03,-420.6 h60
Top Solder:
  text "'.Layer_Name'" at 919.03,-400.6 h60
Bottom Solder:
  text "'.Layer_Name'" at 919.03,-420.6 h60
Board Outline:
  the board outline again, w20
Fabrication:
  the board outline again, w20
Fabrication (Mech3):
  lines w30: -323.13,-2335.45 -323.13,-2277
Drill Drawing:
  circle w10: c4119.13,283.7 r33.33
  lines w10: 5323.53,1339.59 6173.53,1339.59 ; 5323.53,1439.59 6173.53,1439.59 ; 5323.53,2039.59 6173.53,2039.59 ; 5323.53,2139.59 6173.53,2139.59 ; 5373.53,1639.59 5473.53,1539.59 ; 5373.53,1939.59 5473.53,1839.59 ; 5423.53,1539.59 5323.53,1639.59 ; 5423.53,1639.59 5523.53,1539.59 ; 5423.53,1839.59 5323.53,1939.59 ; 5423.53,1939.59 5523.53,1839.59 ; 5473.53,1639.59 5573.53,1539.59 ; 5473.53,1939.59 5573.53,1839.59 ; 5523.53,1639.59 5623.53,1539.59 ; 5523.53,1939.59 5623.53,1839.59 ; 5573.53,1639.59 5673.53,1539.59 ; 5573.53,1939.59 5673.53,1839.59 ; 5623.53,1639.59 5723.53,1539.59 ; 5623.53,1939.59 5723.53,1839.59 ; 5673.53,1639.59 5773.53,1539.59 ; 5673.53,1939.59 5773.53,1839.59 ; 5723.53,1639.59 5823.53,1539.59 ; 5723.53,1939.59 5823.53,1839.59 ; 5773.53,1639.59 5873.53,1539.59 ; 5773.53,1939.59 5873.53,1839.59 ; 5823.53,1639.59 5923.53,1539.59 ; 5823.53,1939.59 5923.53,1839.59 ; 5873.53,1639.59 5973.53,1539.59 ; 5873.53,1939.59 5973.53,1839.59 ; 5923.53,1639.59 6023.53,1539.59 ; 5923.53,1939.59 6023.53,1839.59 ; 5973.53,1639.59 6073.53,1539.59 ; 5973.53,1939.59 6073.53,1839.59 ; 6023.53,1639.59 6123.53,1539.59 ; 6023.53,1939.59 6123.53,1839.59 ; 6073.53,1639.59 6173.53,1539.59 ; 6073.53,1939.59 6173.53,1839.59 ; 5323.53,1639.59 6173.53,1639.59 6173.53,1589.59 6173.53,1539.59 ; 5323.53,1639.59 5323.53,1589.59 5323.53,1539.59 6173.53,1539.59 ; 5323.53,1939.59 5323.53,1889.59 5323.53,1839.59 6173.53,1839.59 ; 5323.53,1939.59 6173.53,1939.59 6173.53,1889.59 6173.53,1839.59 ; 4085.8,-166.3 4119.13,-199.64 4152.46,-166.3 4119.13,-132.97 4085.8,-166.3 ; 4085.8,17.03 4152.46,17.03 4119.13,-49.64 4085.8,17.03 ; 4085.8,100.36 4152.46,100.36 4152.46,167.03 4085.8,167.03 4085.8,100.36 ; 4085.8,417.03 4102.46,417.03 4102.46,400.36 4135.8,400.36 4135.8,417.03 4152.46,417.03 4152.46,450.36 4135.8,450.36 4135.8,467.03 4102.46,467.03 4102.46,450.36 4085.8,450.36 4085.8,417.03 ; 4085.8,550.36 4085.8,567.03 4102.46,583.7 4085.8,600.36 4085.8,617.03 4102.46,617.03 4119.13,600.36 4135.8,617.03 4152.46,617.03 4152.46,600.36 4135.8,583.7 4152.46,567.03 4152.46,550.36 4135.8,550.36 4119.13,567.03 4102.46,550.36 4085.8,550.36 ; 4085.8,717.03 4102.46,717.03 4119.13,700.36 4135.8,717.03 4152.46,717.03 4135.8,733.7 4152.46,750.36 4135.8,750.36 4119.13,767.03 4102.46,750.36 4085.8,750.36 4102.46,733.7 4085.8,717.03 ; 4085.8,850.36 4119.13,867.03 4152.46,850.36 4135.8,883.7 4152.46,917.03 4119.13,900.36 4085.8,917.03 4102.46,883.7 4085.8,850.36 ; 5323.53,1689.59 5323.53,1789.59 6173.53,1789.59 6173.53,1689.59 5323.53,1689.59
  lines w15: 4026,-244.64 12903.54,-244.64 ; 4026,955.36 12903.54,955.36 ; 4576.88,-394.64 4576.88,1105.36 ; 5176.72,-394.64 5176.72,1105.36 ; 6326.38,-394.64 6326.38,1105.36 ; 6832.26,-394.64 6832.26,1105.36 ; 7566.06,-394.64 7566.06,1105.36 ; 9065.61,-394.64 9065.61,1105.36 ; 9655.46,-394.64 9655.46,1105.36 ; 10401.26,-394.64 10401.26,1105.36 ; 11500.94,-394.64 11500.94,1105.36 ; 4026,-394.64 12903.54,-394.64 12903.54,1105.36 4026,1105.36 4026,-394.64
  text "LAYER STACKUP DETAILS:" at 5323.53,2289.59 h60
  text "TOP SILKSCREEN" at 6223.53,2119.59 h40
  text "TOP SOLERMASK" at 6228.53,2019.59 h40
  text "TW - 8MIL, AIR GAP - 5MIL, COPLANAR SPACING - 6MIL 90 OHM IMPEDANCE" at 6512,1877 h40
  text "L01 TOP" at 6233.53,1874.59 h40
  text "1 OZ  MINIMUM (COPPER + PLATING)" at 4244.53,1863.59 h40
  text "L02 BOTTOM" at 6233.53,1569.59 h40
  text "1 OZ  MINIMUM (COPPER + PLATING)" at 4249.53,1568.59 h40
  text "BOTTOM SOLERMASK" at 6228.53,1434.59 h40
  text "BOTTOM SILKSCREEN" at 6223.53,1324.59 h40
  text "DRILL TOLERANCE : PTH +/- 3mil, NPTH +/- 2MIL" at 8320.5,1203.5 h60
  text "Symbol" at 4116,1000.36 h72
  text "Count" at 4621.88,1000.36 h72
  text "Hole Size" at 5221.72,1000.36 h72
  text "Plated" at 6371.38,1000.36 h72
  text "Hole Type" at 6877.26,1000.36 h72
  text "Drill Layer Pair" at 7611.06,1000.36 h72
  text "Via/Pad" at 9110.61,1000.36 h72
  text "Pad Shape" at 9700.46,1000.36 h72
  text "Hole Length" at 10446.26,1000.36 h72
  text "Routed Path Length" at 11545.94,1000.36 h72
  text "2" at 4621.88,850.36 h60
  text "19.69mil (0.500mm)" at 5221.72,850.36 h60
  text "PTH" at 6371.38,850.36 h60
  text "Slot" at 6877.26,850.36 h60
  text "Top Layer - Bottom Layer" at 7611.06,850.36 h60
  text "Pad" at 9110.61,850.36 h60
  text "Rounded" at 9700.46,850.36 h60
  text "45.28mil (1.150mm)" at 10446.26,850.36 h60
  text "25.59mil (0.650mm)" at 11545.94,850.36 h60
  text "2" at 4621.88,700.36 h60
  text "21.65mil (0.550mm)" at 5221.72,700.36 h60
  text "PTH" at 6371.38,700.36 h60
  text "Slot" at 6877.26,700.36 h60
  text "Top Layer - Bottom Layer" at 7611.06,700.36 h60
  text "Pad" at 9110.61,700.36 h60
  text "Rounded" at 9700.46,700.36 h60
  text "33.47mil (0.850mm)" at 10446.26,700.36 h60
  text "11.81mil (0.300mm)" at 11545.94,700.36 h60
  text "3" at 4621.88,550.36 h60
  text "39.00mil (0.991mm)" at 5221.72,550.36 h60
  text "NPTH" at 6371.38,550.36 h60
  text "Round" at 6877.26,550.36 h60
  text "Top Layer - Bottom Layer" at 7611.06,550.36 h60
  text "Pad" at 9110.61,550.36 h60
  text "Rounded" at 9700.46,550.36 h60
  text "-" at 10446.26,550.36 h60
  text "-" at 11545.94,550.36 h60
  text "3" at 4621.88,400.36 h60
  text "74.80mil (1.900mm)" at 5221.72,400.36 h60
  text "PTH" at 6371.38,400.36 h60
  text "Round" at 6877.26,400.36 h60
  text "Top Layer - Bottom Layer" at 7611.06,400.36 h60
  text "Pad" at 9110.61,400.36 h60
  text "Rounded" at 9700.46,400.36 h60
  text "-" at 10446.26,400.36 h60
  text "-" at 11545.94,400.36 h60
  text "4" at 4621.88,250.36 h60
  text "125.98mil (3.200mm)" at 5221.72,250.36 h60
  text "NPTH" at 6371.38,250.36 h60
  text "Round" at 6877.26,250.36 h60
  text "Top Layer - Bottom Layer" at 7611.06,250.36 h60
  text "Pad" at 9110.61,250.36 h60
  text "Rounded" at 9700.46,250.36 h60
  text "-" at 10446.26,250.36 h60
  text "-" at 11545.94,250.36 h60
  text "18" at 4621.88,100.36 h60
  text "10.10mil (0.257mm)" at 5221.72,100.36 h60
  text "PTH" at 6371.38,100.36 h60
  text "Round" at 6877.26,100.36 h60
  text "Top Layer - Bottom Layer" at 7611.06,100.36 h60
  text "Via" at 9110.61,100.36 h60
  text "Rounded" at 9700.46,100.36 h60
  text "-" at 10446.26,100.36 h60
  text "-" at 11545.94,100.36 h60
  text "32" at 4621.88,-49.64 h60
  text "39.37mil (1.000mm)" at 5221.72,-49.64 h60
  text "PTH" at 6371.38,-49.64 h60
  text "Round" at 6877.26,-49.64 h60
  text "Top Layer - Bottom Layer" at 7611.06,-49.64 h60
  text "Pad" at 9110.61,-49.64 h60
  text "(Mixed)" at 9700.46,-49.64 h60
  text "-" at 10446.26,-49.64 h60
  text "-" at 11545.94,-49.64 h60
  text "229" at 4621.88,-199.64 h60
  text "10.00mil (0.254mm)" at 5221.72,-199.64 h60
  text "PTH" at 6371.38,-199.64 h60
  text "Round" at 6877.26,-199.64 h60
  text "Top Layer - Bottom Layer" at 7611.06,-199.64 h60
  text "Via" at 9110.61,-199.64 h60
  text "Rounded" at 9700.46,-199.64 h60
  text "-" at 10446.26,-199.64 h60
  text "-" at 11545.94,-199.64 h60
  text "293 Total" at 4621.88,-349.64 h60
  text "'.Layer_Name'" at 923.75,-402.29 h60
  text "Slot definitions :" at 4116,-494.61 h60
  text "Routed Path Length" at 5148.69,-494.61 h60
  text "= Calculated from tool start centre position to tool end centre position." at 6251.36,-494.61 h60
  text "Hole Length" at 5148.69,-594.59 h60
  text "= Routed Path Length + Tool Size = Slot length as defined in the PCB layout" at 5841.49,-594.59 h60
Mechanical 18:
  circle w10: c-270.39,3103.76 r50
  circle w10: c-270.39,3103.76 r100
  circle w10: c3366.09,3103.15 r100
  circle w10: c3366.09,3103.15 r50
  circle w10: c-271.13,-640.9 r100
  circle w10: c-271.13,-640.9 r50
  lines w10: -421.13,-640.9 -121.13,-640.9 ; -420.39,3103.76 -120.39,3103.76 ; -271.13,-790.9 -271.13,-490.9 ; -270.39,2953.76 -270.39,3253.76 ; 3216.09,3103.15 3516.09,3103.15 ; 3366.09,2953.15 3366.09,3253.15
Mechanical 19:
  text "BOARD OUTLINE" at 342.25,-2328.29 h100
Mechanical 20:
  text "TOP ASSEMBLY" at 1682.25,-2308.29 h100
Mechanical 21:
  text "BOTTOM ASSEMBLY" at 1702.25,-2308.29 h100

## Dimensions
2700,1490 to 2600,1590 on Fabrication
2600,1590 to 2600,2040 on Fabrication
2700,1490 to 2700,200 on Fabrication
2600,100 to 2700,200 on Fabrication
2560,0 to 2600,100 on Fabrication
0,2060 to 2600,2040 on Fabrication
0,2060 to 2540,2100 on Fabrication
2560,40 to 2840,-210 on Fabrication
40,40 to -160,-130 on Fabrication
40,2060 to -160,2250 on Fabrication
40,0 to 40,2100 on Fabrication
0,40 to 2600,40 on Fabrication
0,40 to 2700,200 on Fabrication

## Text inside footprints (layer, text, board x,y; h text height)
J2: Top Overlay "1" at 2429.53,1901.57 h80 r90; Top Overlay "0" at 2524.02,1893.7 h80 r90; Top Overlay "2" at 2311.42,1893.7 h80 r90; Top Overlay "~3" at 2220.87,1854.33 h80 r90; Top Overlay "4" at 2126.38,1897.64 h80 r90; Top Overlay "~5" at 2024.02,1858.27 h80 r90; Top Overlay "~6" at 1925.59,1858.27 h80 r90; Top Overlay "7" at 1827.17,1897.64 h80 r90
J3: Top Overlay "GND" at 1075,1760 h80 r90; Top Overlay "SCL 19" at 772.68,1696.85 h80 r90; Top Overlay "SDA 18" at 871.1,1688.98 h80 r90; Top Overlay "AREF" at 977.4,1748.03 h80 r90; Top Overlay "8" at 1662.44,1893.77 h80 r90; Top Overlay "~9" at 1559,1856 h80 r90; Top Overlay "~10" at 1465.59,1811.02 h80 r90; Top Overlay "~11" at 1371.1,1811.02 h80 r90; Top Overlay "12" at 1268.74,1858.27 h80 r90; Top Overlay "13" at 1170.32,1858.27 h80 r90
J4: Top Overlay "DIGITAL" at 1955,250 h80; Top Overlay "~19" at 2517.72,166.93 h80 r90; Top Overlay "~18" at 2415.35,166.93 h80 r90; Top Overlay "~17" at 2316.93,166.93 h80 r90; Top Overlay "16" at 2214.57,166.93 h80 r90; Top Overlay "15" at 2116.14,166.93 h80 r90; Top Overlay "14" at 2017.72,166.93 h80 r90
J5: Fabrication (Mech3) "PCB EDGE" at -67.19,1277.83 h25 r270
J6: Top Overlay "GND" at 1619,170 h80 r90; Top Overlay "GND" at 1724,170 h80 r90; Top Overlay "POWER" at 1440.46,353.28 h80; Top Overlay "VIN" at 1820.08,170.87 h80 r90; Top Overlay "5.0V" at 1516.93,170.87 h80 r90; Top Overlay "3.3V" at 1425,175 h80 r90; Top Overlay "RESET" at 1320.08,170.87 h80 r90; Top Overlay "IOREF" at 1221.52,170.36 h80 r90